# EAGLE board communications_hub2_1 (EAGLE 9.4.0)
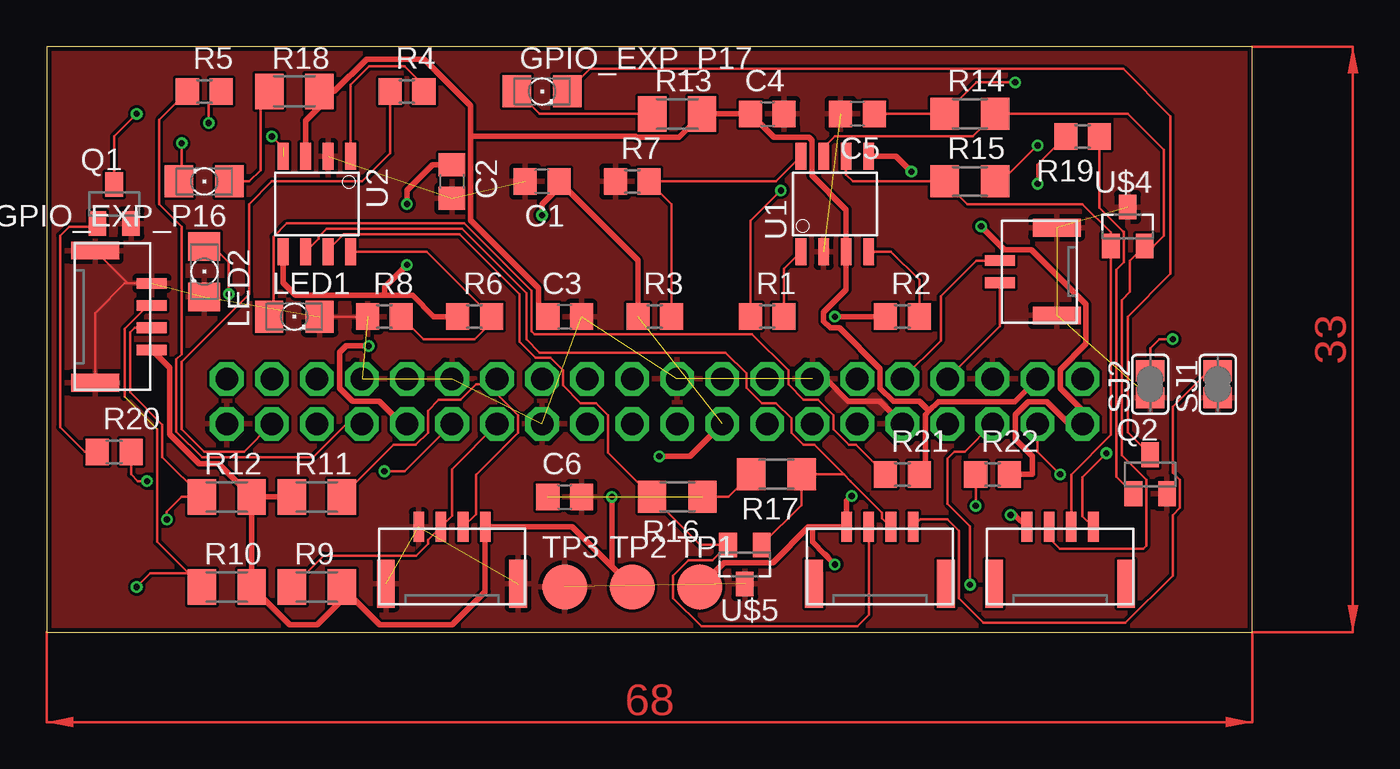
[diagram p0: board, top side]
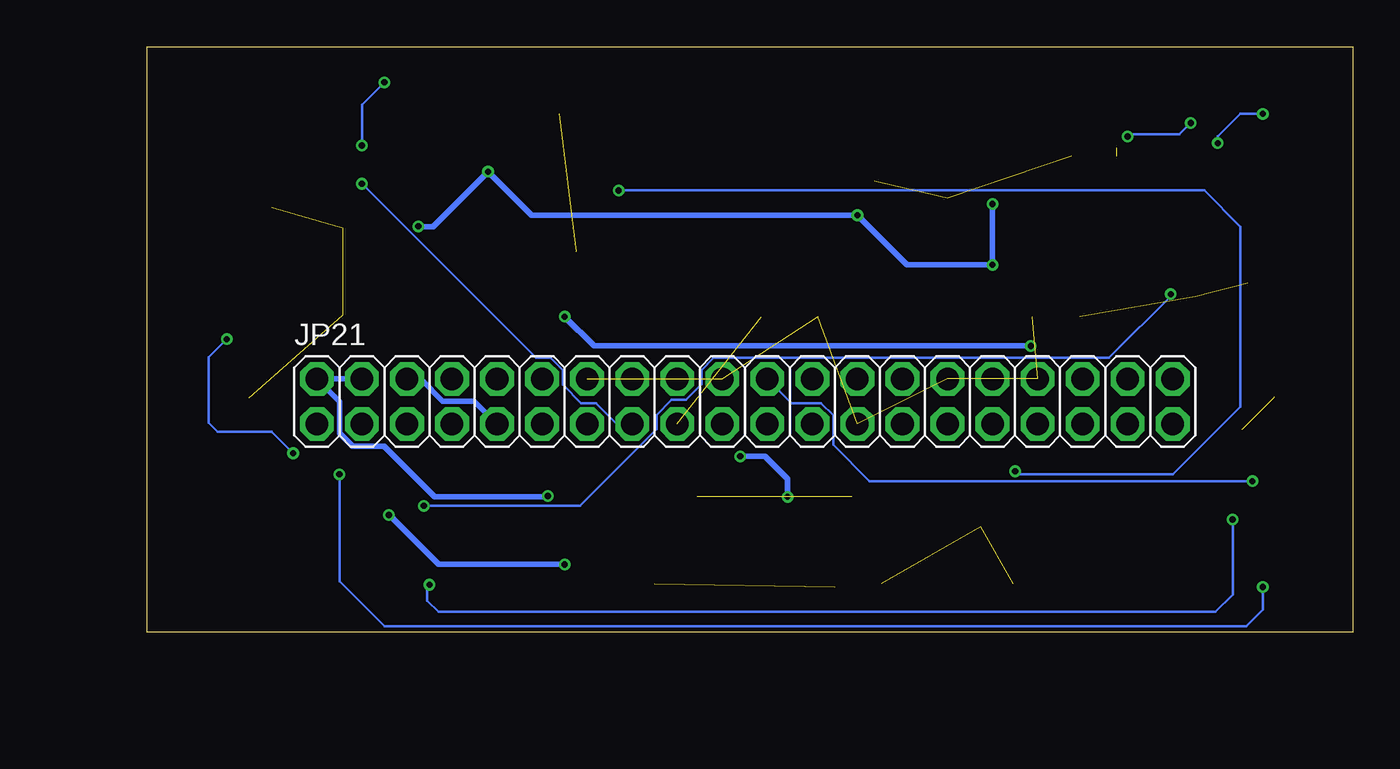
[diagram p1: board, bottom side, seen from below]

Size 68 x 33 mm. Coordinates in mm from the lower left corner, seen from the top.
Outline: 0,0 68,0 68,33 0,33 0,0
Copper layers (1*16): Top 0.035mm / dielectric 1.5mm / Bottom 0.035mm
Design rules "JLCPCB2Layer": minimum track width 6mil, minimum drill 10mil, track to track 6mil, track to pad 6mil, pad to pad 6mil, via to via 6mil, smd to smd 0mil, copper to edge 10mil, drill to drill 10mil, minimum pad ring 6mil, minimum via ring 6mil, stop-mask expansion 2mil, vias tented up to drill 100mil, thermal gap 10mil

## Footprints (pad centres in the part's own frame; a part is rotated, then mirrored left to right if it is on the bottom)
C0805 = smd 1.3 x 1.5: 1 -0.95,0; 2 0.95,0
SM04B-GHS-TB = smd 0.6 x 1.7: P$1 -1.875,0.85; P$2 -0.625,0.85; P$3 0.625,0.85; P$4 1.875,0.85 | smd 1 x 2.7: P$5 -3.725,-2.35; P$6 3.725,-2.35
SM02B-GHS-TB = smd 0.6 x 1.7: P$1 -0.625,0.85; P$2 0.625,0.85 | smd 1 x 2.7: P$3 -2.475,-2.35; P$4 2.475,-2.35
SM04B-GHS-TB' = smd 0.6 x 1.7: 1 -1.875,0.85; 2 -0.625,0.85; 3 0.625,0.85; 4 1.875,0.85 | smd 1 x 2.7: TAB_A -3.725,-2.35; TAB_B 3.725,-2.35
LED_1206 = smd 1.6 x 1.803: A -1.422,0; C 1.422,0
2X20 = drill 1.27 octagon: 1 -24.13,-1.27; 2 -24.13,1.27; 3 -21.59,-1.27; 4 -21.59,1.27; 5 -19.05,-1.27; 6 -19.05,1.27; 7 -16.51,-1.27; 8 -16.51,1.27; 9 -13.97,-1.27; 10 -13.97,1.27; 11 -11.43,-1.27; 12 -11.43,1.27; 13 -8.89,-1.27; 14 -8.89,1.27; 15 -6.35,-1.27; 16 -6.35,1.27; 17 -3.81,-1.27; 18 -3.81,1.27; 19 -1.27,-1.27; 20 -1.27,1.27; 21 1.27,-1.27; 22 1.27,1.27; 23 3.81,-1.27; 24 3.81,1.27; 25 6.35,-1.27; 26 6.35,1.27; 27 8.89,-1.27; 28 8.89,1.27; 29 11.43,-1.27; 30 11.43,1.27; 31 13.97,-1.27; 32 13.97,1.27; 33 16.51,-1.27; 34 16.51,1.27; 35 19.05,-1.27; 36 19.05,1.27; 37 21.59,-1.27; 38 21.59,1.27; 39 24.13,-1.27; 40 24.13,1.27
1206 = smd 1.6 x 1.803: A -1.422,0; C 1.422,0
SOT23 = smd 1 x 1.4: 1 -0.95,-1.1; 2 0.95,-1.1; 3 0,1.1
R0805 = smd 1.3 x 1.5: 1 -0.95,0; 2 0.95,0
M1206 = smd 1.6 x 2: 1 -1.4,0; 2 1.4,0
R1206 = smd 1.6 x 1.803: 1 -1.422,0; 2 1.422,0
SJ = smd 1.168 x 1.6: 1 -0.762,0; 2 0.762,0
B2,54 = smd 2.54 x 2.54: TP 0,0
SO-8 = smd 1.524 x 0.61: 1 -2.692,1.905; 2 -2.692,0.635; 3 -2.692,-0.635; 4 -2.692,-1.905; 5 2.692,-1.905; 6 2.692,-0.635; 7 2.692,0.635; 8 2.692,1.905

## Placement (x,y rotation side)
C1  10u  [C0805]  27.94,25.4 180 top
C2  10u  [C0805]  22.86,25.4 270 top
C3  10u  [C0805]  29.21,17.78 0 top
C4  10u  [C0805]  40.64,29.21 0 top
C5  4n7  [C0805]  45.72,29.21 180 top
C6  4n7  [C0805]  29.21,7.62 0 top
CON1  SM04B-GHS-TB  [SM04B-GHS-TB]  22.86,5.08 0 top
CON2  SM04B-GHS-TB  [SM04B-GHS-TB]  5.08,17.78 270 top
CON3  SM02B-GHS-TB  [SM02B-GHS-TB]  54.61,20.32 90 top
CON6  UAVCAN_MICRO  [SM04B-GHS-TB']  57.15,5.08 0 top
CON7  UAVCAN_MICRO  [SM04B-GHS-TB']  46.99,5.08 0 top
GPIO_EXP_P16  XZDG55W-3  [LED_1206]  8.89,25.4 180 top
GPIO_EXP_P17  XZM2ACR55W-3  [LED_1206]  27.94,30.48 0 top
JP21  [2X20]  34.29,13 0 bottom
LED1  [1206]  13.97,17.78 0 top
LED2  [1206]  8.89,20.32 270 top
Q1  DMN5L06K  [SOT23]  3.81,24.13 0 top
Q2  DMN5L06K  [SOT23]  62.23,8.89 0 top
R1  220  [R0805]  40.64,17.78 0 top
R2  220  [R0805]  48.26,17.78 0 top
R3  1k  [R0805]  34.29,17.78 0 top
R4  220  [R0805]  20.32,30.48 0 top
R5  220  [R0805]  8.89,30.48 0 top
R6  1K  [R0805]  24.13,17.78 0 top
R7  10k  [R0805]  33.02,25.4 0 top
R8  10k  [R0805]  19.05,17.78 0 top
R9  10K  [M1206]  15.24,2.54 0 top
R10  10K  [M1206]  10.16,2.54 0 top
R11  10K  [M1206]  15.24,7.62 0 top
R12  10K  [M1206]  10.16,7.62 0 top
R13  140  [M1206]  35.56,29.21 0 top
R14  60  [R1206]  52.07,29.21 0 top
R15  60  [R1206]  52.07,25.4 0 top
R16  60  [R1206]  35.56,7.62 180 top
R17  60  [R1206]  41.15,8.89 180 top
R18  85  [M1206]  13.97,30.48 0 top
R19  220  [R0805]  58.42,27.94 180 top
R20  220  [R0805]  3.81,10.16 0 top
R21  140  [R0805]  48.26,8.89 0 top
R22  66  [R0805]  53.34,8.89 0 top
SJ1  [SJ]  66.04,13.97 90 top
SJ2  [SJ]  62.23,13.97 90 top
TP1  TPB2,54  [B2,54]  36.83,2.54 0 top
TP2  TPB2,54  [B2,54]  33.02,2.54 0 top
TP3  TPB2,54  [B2,54]  29.21,2.54 0 top
U1  TCAN1042HVDR  [SO-8]  44.45,24.13 90 top
U2  TCAN1042HVDR  [SO-8]  15.24,24.13 270 top
U$4  NUP2105L  [SOT23]  60.96,22.86 0 top
U$5  NUP2105L  [SOT23]  39.37,3.81 180 top

## Library data of the parts
C1-C6 R1-R18 R21 R22 = resistor
CON1-CON3 U1 U2 U$4 U$5 = ARVP
CON6 CON7 = SPEAR-general
GPIO_EXP_P16 GPIO_EXP_P17 = eagle-ltspice; SPICEMODEL: NONE; SPICEPREFIX: D; SPICETYPE: diode
JP21 = commhub
LED1 LED2 = led
Q1 Q2 = transistor-small-signal
R19 R20 = rcl
SJ1 SJ2 = jumper
TP1-TP3 = testpad

## Nets
+3V3: C1.1 C2.1 CON1.P$4 CON2.P$4 JP21.1 JP21.17 R3.1 R6.1 R9.2 R10.2 R11.1 R12.2 R22.2 TP2.TP U1.5 U2.5
+5V: C3.1 C4.1 CON6.1 CON7.1 JP21.2 JP21.4 R13.2 R18.2 R21.2 TP1.TP U1.3 U2.3
CAN0_RX_T: JP21.31 R2.1
CAN0_TX_T: JP21.29 R1.1
CAN1_RX_T: JP21.33 R5.1
CAN1_TX_T: JP21.37 R4.1
GND: C1.2 C2.2 C3.2 C4.2 C5.2 C6.2 CON1.P$1 CON1.P$5 CON1.P$6 CON2.P$1 CON2.P$5 CON2.P$6 CON3.P$3 CON3.P$4 JP21.6 JP21.9 JP21.14 JP21.20 JP21.25 JP21.30 JP21.34 JP21.39 LED1.C LED2.C Q1.2 Q2.2 R7.1 R8.1 SJ1.1 SJ2.1 TP3.TP U1.2 U2.2 U$4.3 U$5.3
GPIO_EXP_P16: JP21.22 R20.2
GPIO_EXP_P17: JP21.15 R19.2
I2C_GP0_SCL: CON2.P$3 JP21.5 R12.1
I2C_GP0_SDA: CON2.P$2 JP21.3 R10.1
I2C_GP1_SCL: CON1.P$3 JP21.28 R11.2
I2C_GP1_SDA: CON1.P$2 JP21.27 R9.1
N$3: GPIO_EXP_P17.A R13.1
N$4: GPIO_EXP_P16.A R18.1
N$7: CON7.4 SJ1.2
N$8: CON6.4 SJ2.2
N$9: GPIO_EXP_P17.C Q2.3
N$10: GPIO_EXP_P16.C Q1.3
N$11: Q2.1 R19.1
N$12: Q1.1 R20.1
N$13: LED1.A R21.1
N$14: LED2.A R22.1
N$19: C5.1 R14.1 R15.2
N$20: C6.1 R16.1 R17.2
N$21: CON7.2 R16.2 U2.7 U$5.2
N$22: CON7.3 R17.1 U2.6 U$5.1
N$23: CON6.2 R14.2 U1.7 U$4.2
N$24: CON6.3 R15.1 U1.6 U$4.1
N$25: R1.2 U1.1
N$26: R2.2 U1.4
N$27: R3.2 R7.2 U1.8
N$28: R4.2 U2.1
N$29: R5.2 U2.4
N$30: R6.2 R8.2 U2.8
UART1_RX: CON3.P$2 JP21.10
UART1_TX: CON3.P$1 JP21.8

## Tracks (layer width: path | path; a pad name or v marks a point on that pad's centre or on a via)
+3V3  (via drill 0.35)  (1 unrouted)
  Top 0.305: U2.5 13.34,19.68 14.03,18.99 19.05,18.99 | R6.1 21.83,17.78 20.62,18.99 19.05,18.99 | CON2.P$4 6.93,14.9 6.93,11.15 8.61,9.47 9.71,9.47 R12.2 | R12.2 R11.1 | R12.2 R10.2 13.69,0.41 15.24,0.41 16.64,1.81 R9.2 18.77,0.41 22.86,0.41 24.73,2.28 CON1.P$4 29.63,5.93 TP2.TP 31.88,3.68 v31.88,7.62 | R3.1 33.34,20.95 C1.1 28.89,25.08 27.94,24.13 v27.94,23.5 | R22.2 55.58,8.89 55.58,9.92 54.62,10.88 54.62,12.25 55.36,12.99 56.4,12.99 57.66,11.73 JP21.1 | JP21.17 36.28,9.91 v34.54,9.91 | v20.32,24.13 20.32,24.89 21.78,26.35 C2.1 23.46,26.35 | v20.32,20.7 19.05,19.43 19.05,18.99 | U1.5 47.9,26.82 v48.77,25.96 | 58.42,11.43 JP21.1 | v52.69,22.87 54.02,21.55 55.54,21.55 58.62,18.47 58.62,16.24 57.16,14.79 57.16,13.75 58.42,12.49 JP21.1
  Bottom 0.305: v34.54,9.91 33.15,9.91 31.88,8.64 v31.88,7.62 | v20.32,24.13 v20.32,20.7 25.15,20.7 v27.94,23.5 46.31,23.5 v48.77,25.96 51.86,22.86 v52.68,22.86 v52.69,22.87
+5V  (via drill 0.35)
  Top 0.305: U2.3 14.61,28.83 15.37,29.59 R18.2 16.23,30.48 18.03,32.29 21.29,32.29 23.91,29.67 23.91,27.94 | TP1.TP 38.2,3.9 40.95,3.9 42.97,5.93 43.18,5.93 | 43.18,5.93 CON7.1 45.12,7.39 v45.39,7.67 | C3.1 27.74,18.3 27.74,19.38 23.91,23.21 23.91,27.94 | 49.76,12.47 49.54,12.25 49.54,9.22 R21.2 | 49.76,12.47 50.28,12.99 54.6,12.99 JP21.4 | CON6.1 54.61,6.59 54.61,6.6 v54.36,6.6 | 43.18,5.93 43.18,5.08 43.88,4.38 43.89,4.38 44.07,4.21 44.07,4.19 v44.45,3.81 | 23.91,27.94 33.2,27.94 33.23,27.91 35.66,27.91 R13.2 C4.1 41.01,27.89 42.98,27.89 43.16,27.71 43.16,25.75 45.09,23.82 U1.3 45.09,19.31 43.82,18.04 43.82,17.52 44.19,17.15 44.71,17.15 47,14.86 47,13.75 47.74,13.01 49.22,13.01 49.76,12.47
  Bottom 0.305: v54.36,6.6 51.56,3.81 v44.45,3.81 | JP21.4 JP21.2 57.14,12.99 57.14,11.21 56.4,10.47 54.62,10.47 51.77,7.62 45.44,7.62 v45.39,7.67
CAN0_RX_T  (via drill 0.35)
  Top 0.305: JP21.31 20.02,11.73 18.74,13.01 17.26,13.01 16.52,13.75 16.52,15.76 16.89,16.13 v18.16,16.13 | R2.1 v44.45,17.78
  Bottom 0.305: v44.45,17.78 42.8,16.13 v18.16,16.13
CAN0_TX_T  (via drill 0.35)
  Top 0.152: R1.1 39.69,23.18 v41.4,24.89 | v19.05,9.06 20.2,9.06 JP21.29
  Bottom 0.152: v41.4,24.89 8.38,24.89 6.35,22.86 6.35,12.7 10.16,8.89 19.05,8.89 v19.05,9.06
CAN1_RX_T
  Top 0.152: JP21.33 16.91,11.73 15.04,9.86 8.76,9.86 7.32,11.3 7.32,15.37 7.62,15.67 7.62,22.86 6.35,24.13 6.35,28.89 R5.1
CAN1_TX_T
  Top 0.152: JP21.37 11.13,10.16 8.89,10.16 7.62,11.43 7.62,15.24 11.43,19.05 11.43,24.13 12.7,25.4 17.78,25.4 19.37,26.99 R4.1
GND  (17 unrouted)
  Top 0.152: LED1.C R8.1 | CON2.P$6 2.73,17.97 4.42,19.66 CON2.P$1 4.58,19.66 CON2.P$5
  Top 0.305: JP21.9 46.98,13.01 45.2,13.01 43.94,14.27 JP21.14
  Bottom 0.305: JP21.9 49.54,13.01 51.32,13.01 52.58,14.27 JP21.6
  pour Top: 0,33.02 0,0 67.94,0 67.94,32.89 0.13,32.89
GPIO_EXP_P16  (via drill 0.35)
  Top 0.152: R20.2 4.76,8.89 5.14,8.51 v5.67,8.51
  Bottom 0.152: v5.67,8.51 27.26,8.51 29.3,10.55 29.3,12.22 29.99,12.91 31.66,12.91 JP21.22
GPIO_EXP_P17  (via drill 0.35)
  Top 0.152: R19.2 55.88,26.35 v55.88,25.27
  Bottom 0.152: v55.88,25.27 46.06,15.45 45.23,15.45 44.54,14.76 44.54,13.93 43.52,12.91 42.69,12.91 41.51,11.73 JP21.15
I2C_GP0_SCL  (via drill 0.35)
  Top 0.152: CON2.P$3 4.96,17.16 4.7,16.89 4.7,13.51 6.53,11.68 6.53,9.85 R12.1 7.62,7.62 6.78,6.78 v6.78,6.35 | v52.07,2.67 52.07,5.97 50.8,7.24 50.8,9.78 51.18,10.16 51.77,10.16 JP21.5
  Bottom 0.152: v52.07,2.67 52.2,2.67 52.2,1.78 51.56,1.14 7.75,1.14 6.78,2.11 v6.78,6.35
I2C_GP0_SDA  (via drill 0.35)  (1 unrouted)
  Top 0.152: CON2.P$2 5.71,18.41 5.71,18.4 4.39,17.09 4.39,13.26 | 6.22,11.43 6.22,5.08 R10.1 8,3.3 5.84,3.3 v5.08,2.54 | v57.15,8.89 55.88,10.16 JP21.3
  Bottom 0.152: v5.08,2.54 5.08,1.27 6.02,0.33 54.61,0.33 57.15,2.87 v57.15,8.89
I2C_GP1_SCL
  Top 0.152: CON1.P$3 24.21,6.65 24.21,8.87 26.58,11.24 26.58,12.22 25.4,13.4 25.4,13.97 | 25.4,13.97 JP21.28 | R11.2 19.57,10.55 20.81,10.55 21.5,11.24 21.5,12.48 22.11,13.09 23.35,13.09 24.23,13.97 25.4,13.97
I2C_GP1_SDA
  Top 0.152: JP21.27 22.86,9.19 22.86,6.55 CON1.P$2 21.51,5.21 21.51,4.99 20.84,4.31 15.61,4.31 R9.1
N$3
  Top 0.152: GPIO_EXP_P17.A 27.79,29.21 R13.1
N$4
  Top 0.152: R18.1 12.06,29.97 12.06,26.03 11.43,25.4 GPIO_EXP_P16.A
N$7
  Top 0.152: SJ1.2 65.53,14.73 63.5,12.7 63.5,8.99 63.91,8.59 63.91,7 63.5,6.59 63.5,3.18 60.84,0.52 52.82,0.52 51.44,1.9 51.44,5.71 50.8,6.35 49.28,6.35 CON7.4
N$8  (via drill 0.35)
  Top 0.152: CON6.4 58.42,6.54 58.42,8.74 v59.76,10.08 | v63.5,16.51 62.74,16.51 62.23,16 SJ2.2
  Bottom 0.152: v59.76,10.08 60.98,11.3 64.01,11.3 64.52,11.81 64.52,15.49 v63.5,16.51
N$9
  Top 0.152: GPIO_EXP_P17.C 30.63,31.75 60.71,31.75 63.37,29.08 63.37,20.19 60.96,17.78 60.96,11.26 Q2.3
N$10  (via drill 0.35)
  Top 0.152: Q1.3 3.81,27.94 v5.08,29.21 | v7.62,27.56 7.62,25.55 GPIO_EXP_P16.C
  Bottom 0.152: v5.08,29.21 6.35,29.21 7.62,27.94 v7.62,27.56
N$11
  Top 0.152: R19.1 59.37,23.92 60.7,22.6 60.74,22.55 60.74,20.86 60.31,20.44 60.31,8.76 Q2.1
N$12
  Top 0.152: Q1.1 2.69,22.86 1.27,22.86 0.76,22.35 0.76,11.56 2.16,10.16 R20.1
N$13
  Top 0.152: R21.1 45.65,10.55 45.23,10.55 44.36,11.42 44.36,12.22 43.49,13.09 42.69,13.09 41.82,13.96 41.82,14.76 39.78,16.8 27.52,16.8 27.36,16.96 27.36,19.23 23.54,23.04 13.54,23.04 12.8,22.29 12.8,18.03 LED1.A
N$14  (via drill 0.35)
  Top 0.152: R22.1 v52.39,7.11 | v10.27,19.05 10.27,20.81 10.29,20.83 9.37,21.74 LED2.A
  Bottom 0.152: v52.39,7.11 43.59,7.11 39.28,11.42 39.28,12.22 38.41,13.09 37.61,13.09 36.74,13.96 36.74,14.76 36.05,15.45 13.76,15.45 10.16,19.05 v10.27,19.05
N$19  (via drill 0.35)
  Top 0.152: C5.1 R14.1 52.43,30.99 v54.61,30.99 | v55.88,27.43 53.85,25.4 R15.2
  Bottom 0.152: v54.61,30.99 55.88,29.72 v55.88,27.43
N$20  (1 unrouted)
  Top 0.152: R17.2 38.46,7.62 R16.1
N$21
  Top 0.152: U2.7 15.88,21.56 16.75,22.43 23.29,22.43 26.67,19.05 26.67,16.36 27.58,15.45 28.43,15.45 29.12,14.76 29.12,13.91 30.12,12.91 30.97,12.91 31.66,12.22 31.66,10.1 R16.2 36.85,4.91 U$5.2 37.55,4.04 36.21,4.04 35.33,3.16 35.33,1.92 36.92,0.33 45.72,0.33 46.37,0.97 CON7.2
N$22
  Top 0.152: U2.6 15.34,22.17 15.34,22.29 15.78,22.73 23.42,22.73 27.05,19.1 27.05,16.51 27.8,15.76 38.28,15.76 39.46,14.58 39.46,13.78 40.33,12.91 41.13,12.91 42,12.04 42,11.24 42.69,10.55 43.3,10.55 44.96,8.89 | CON7.3 47.12,6.43 47.12,6.73 45.34,8.51 44.96,8.89 | 44.96,8.89 R17.1 42.57,7.16 U$5.1
N$23
  Top 0.152: U1.7 43.81,27.3 44.45,27.94 52.22,27.94 R14.2 60.96,29.21 62.99,27.18 62.99,22.35 62.4,21.76 U$4.2 61.09,20.94 61.09,19.18 60.62,18.71 60.62,9.97 62.01,8.59 62.01,4.86 61.85,4.7 57.15,4.7 56.52,5.32 CON6.2
N$24
  Top 0.152: U1.6 45.09,25.78 45.47,25.4 R15.1 51.92,24.13 58.42,24.13 60.01,22.54 U$4.1 60.01,11.12 57.77,8.88 CON6.3
N$25
  Top 0.152: R1.2 41.59,20.48 U1.1
N$26
  Top 0.152: R2.2 49.21,19.85 47.62,21.44 U1.4
N$27
  Top 0.152: R3.2 35.24,24.13 R7.2 41.12,25.4 U1.8
N$28
  Top 0.152: U2.1 17.14,30.86 18.19,31.91 20.19,31.91 21.27,30.83 R4.2
N$29  (via drill 0.35)  (1 unrouted)
  Top 0.152: R5.2 9.14,29.78 v9.14,28.7 | v12.7,27.94 13.34,27.3
  Bottom 0.152: v9.14,28.7 9.78,28.07 12.7,28.07 v12.7,27.94
N$30
  Top 0.152: U2.8 21.42,21.44 R6.2 25.08,17.46 24.13,16.51 21.27,16.51 R8.2
UART1_RX
  Top 0.152: CON3.P$2 52.44,20.95 50.42,18.92 50.42,16.43 JP21.10
UART1_TX
  Top 0.152: CON3.P$1 53.76,17.23 JP21.8
(copper drawn outside any net)
  shapes: Top area x2